# EAGLE board ATA_Test (EAGLE 9.6.2)
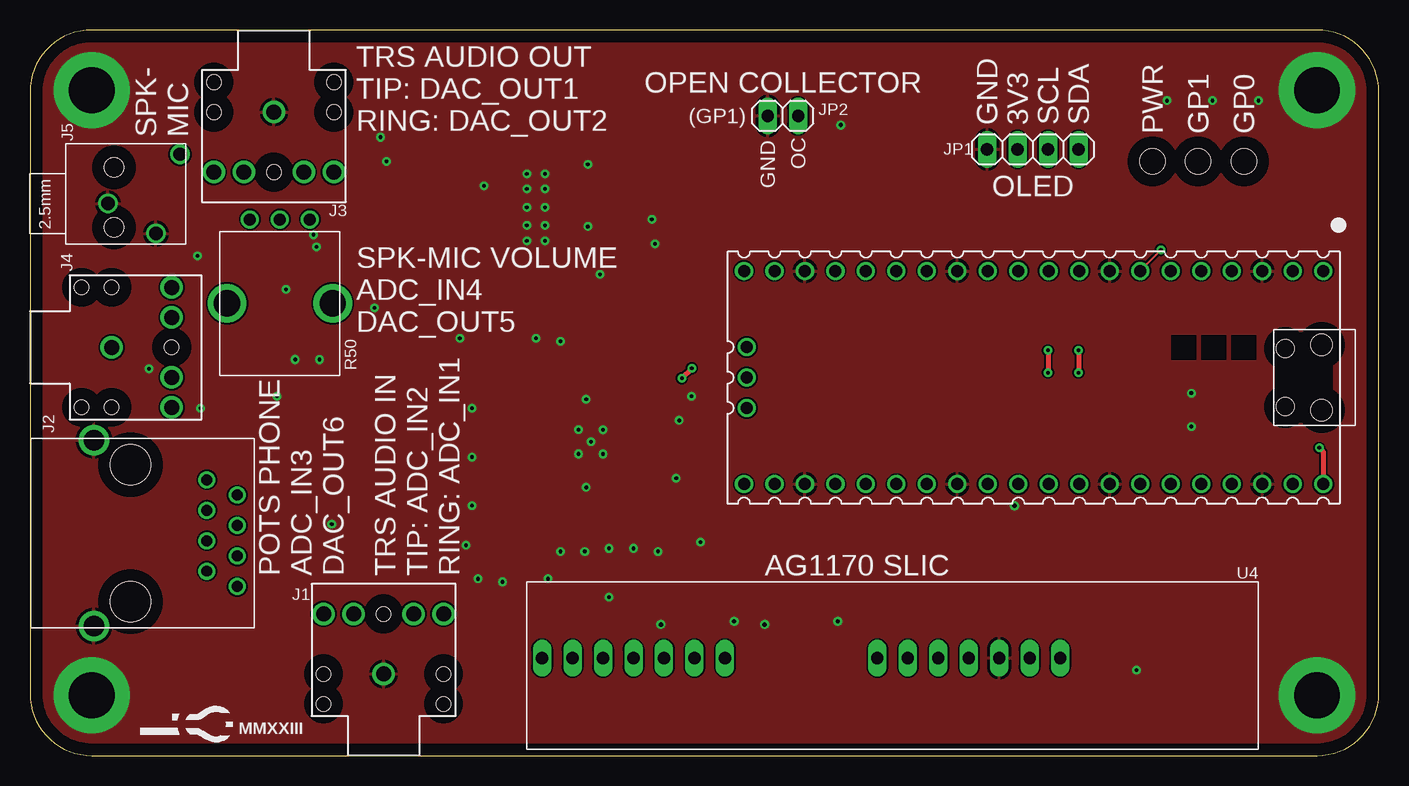
[diagram p0: board, top side]
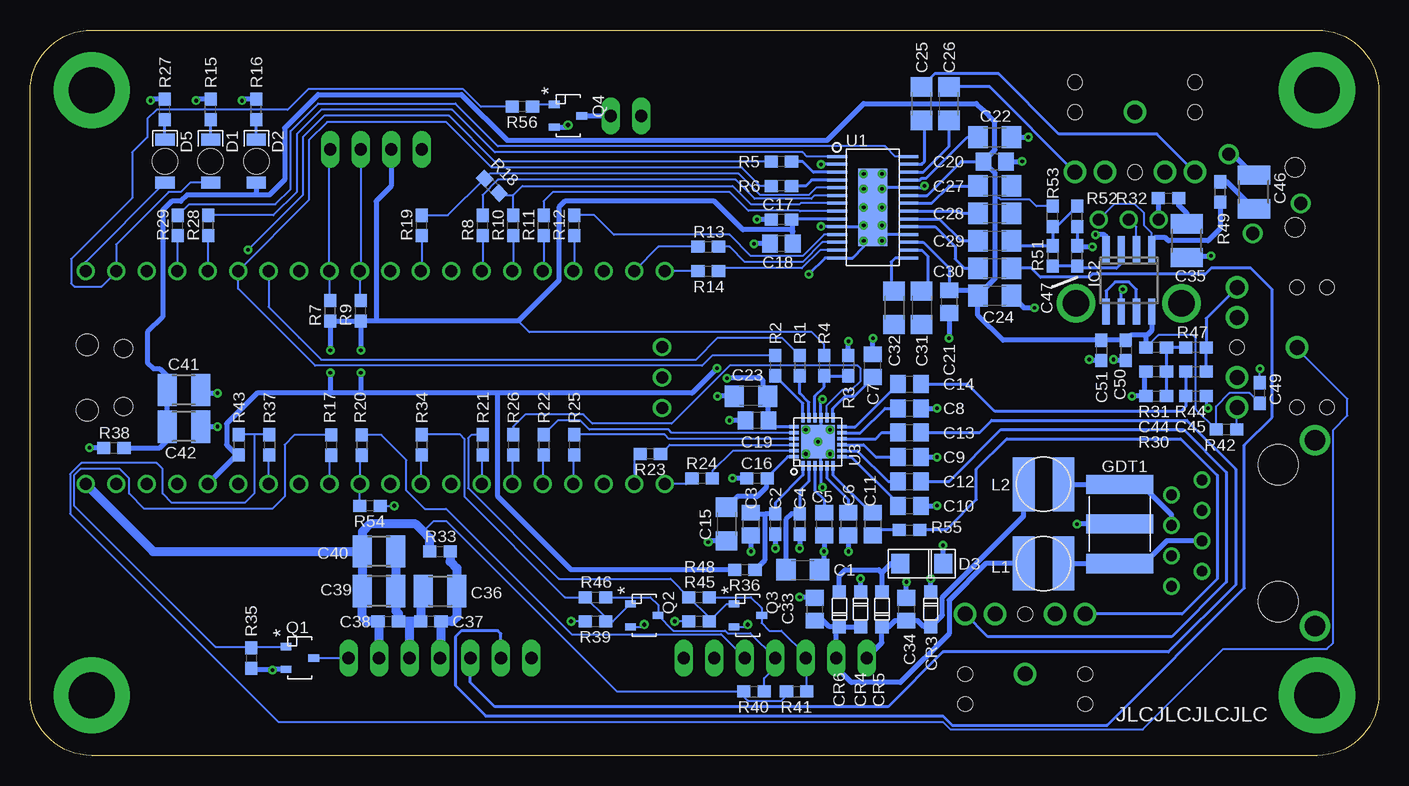
[diagram p1: board, bottom side, seen from below]

Size 112.4 x 60.5 mm. Coordinates in mm from the lower left corner, seen from the top.
Outline: 0,55.35 0,5.15 arc90 5.15,0 107.25,0 arc90 112.4,5.15 112.4,55.35 arc90 107.25,60.5 5.15,60.5 arc90 0,55.35
Copper layers (1*16): Top 0.035mm / dielectric 1.5mm / Bottom 0.035mm
Design rules "default *": minimum track width 6mil, minimum drill 12mil, track to track 6mil, track to pad 6mil, pad to pad 6mil, via to via 6mil, smd to smd 6mil, copper to edge 40mil, drill to drill 6mil, minimum pad ring 10mil, minimum via ring 8mil, stop-mask expansion 4mil, vias tented up to drill 0mil, thermal gap 10mil

## Footprints (pad centres in the part's own frame; a part is rotated, then mirrored left to right if it is on the bottom)
1206 = smd 1.6 x 1.8: 1 -1.4,0; 2 1.4,0
0603 = smd 1.1 x 1: 1 -0.85,0; 2 0.85,0
0805 = smd 1.3 x 1.5: 1 -0.95,0; 2 0.95,0
1210 = smd 1.6 x 2.7: 1 -1.4,0; 2 1.4,0
SOD123 = smd 1.1 x 1.1: 1 -1.45,0; 2 1.45,0
1206_REV = smd 1 x 1.6: A -1.8,0; K 1.8,0 | hole 2.1: 0,0
DO-214AC = smd 1.5 x 1.6: A -1.8,0; C 1.8,0
2036_GDT = smd 1.6 x 5.6: C 0,0; L1 -3.3,0; L2 3.3,0
SO08 = smd 0.6 x 2.2: 1 -1.905,-2.6; 2 -0.635,-2.6; 3 0.635,-2.6; 4 1.905,-2.6; 5 1.905,2.6; 6 0.635,2.6; 7 -0.635,2.6; 8 -1.905,2.6
SJ1-3523N = drill 1.25: 1 0,-3.5; 2 -5,-8.5; 3 5,-8.5; 10 -2.5,-8.5; 11 2.5,-8.5 | hole 1.2: 0,-8.5; 5,-1; -5,-1; 5,-3.5; -5,-3.5
A-2004-2-4-LPS-N-R = drill 0.9: 1 4.445,-6.35; 2 3.175,-8.89; 3 1.905,-6.35; 4 0.635,-8.89; 5 -0.635,-6.35; 6 -1.905,-8.89; 7 -3.175,-6.35; 8 -4.445,-8.89 | drill 1.7: S1 -7.75,3.05; S2 7.75,3.05 | hole 3.35: -5.715,0; 5.715,0
2.5MM_TRS = drill 1.1: R 2.5,7.5; S 0,3.5; T -4.1,9.5 | hole 1.6: -3,4; 2,4
1X04 = drill 1.016 long: 1 -3.81,0; 2 -1.27,0; 3 1.27,0; 4 3.81,0
1X02 = drill 1.016 long: 1 -1.27,0; 2 1.27,0
SDR0403 = smd 4.5 x 1.8: 1 0,1.65; 2 0,-1.65
SOT23-3_CENTERED = smd 0.6 x 0.9: 1 -0.95,-1.15; 2 0.95,-1.15; 3 0,1.15
PTV09 = drill 1: 1 -2.5,0; 2 0,0; 3 2.5,0 | drill 2.2: NC1 -4.4,7; NC2 4.4,7
TSSOP28-POWER = smd 0.25 x 1.65: 1 -4.225,-2.975; 2 -3.575,-2.975; 3 -2.925,-2.975; 4 -2.275,-2.975; 5 -1.625,-2.975; 6 -0.975,-2.975; 7 -0.325,-2.975; 8 0.325,-2.975; 9 0.975,-2.975; 10 1.625,-2.975; 11 2.275,-2.975; 12 2.925,-2.975; 13 3.575,-2.975; 14 4.225,-2.975; 15 4.225,2.975; 16 3.575,2.975; 17 2.925,2.975; 18 2.275,2.975; 19 1.625,2.975; 20 0.975,2.975; 21 0.325,2.975; 22 -0.325,2.975; 23 -0.975,2.975; 24 -1.625,2.975; 25 -2.275,2.975; 26 -2.925,2.975; 27 -3.575,2.975; 28 -4.225,2.975 | smd 6.46 x 2.4: EP 0,0
PICO-PKG-TH = drill 1: 1 -8.89,24.13; 2 -8.89,21.59; 3 -8.89,19.05; 4 -8.89,16.51; 5 -8.89,13.97; 6 -8.89,11.43; 7 -8.89,8.89; 8 -8.89,6.35; 9 -8.89,3.81; 10 -8.89,1.27; 11 -8.89,-1.27; 12 -8.89,-3.81; 13 -8.89,-6.35; 14 -8.89,-8.89; 15 -8.89,-11.43; 16 -8.89,-13.97; 17 -8.89,-16.51; 18 -8.89,-19.05; 19 -8.89,-21.59; 20 -8.89,-24.13; 21 8.89,-24.13; 22 8.89,-21.59; 23 8.89,-19.05; 24 8.89,-16.51; 25 8.89,-13.97; 26 8.89,-11.43; 27 8.89,-8.89; 28 8.89,-6.35; 29 8.89,-3.81; 30 8.89,-1.27; 31 8.89,1.27; 32 8.89,3.81; 33 8.89,6.35; 34 8.89,8.89; 35 8.89,11.43; 36 8.89,13.97; 37 8.89,16.51; 38 8.89,19.05; 39 8.89,21.59; 40 8.89,24.13; 41 -2.54,-23.9; 42 0,-23.9; 43 2.54,-23.9 | hole 1.8: -2.725,24; 2.725,24 | hole 1.5: -2.425,20.97; 2.425,20.97
QFN24-55 = smd 0.8 x 0.3: 1 -2,1.25; 2 -2,0.75; 3 -2,0.25; 4 -2,-0.25; 5 -2,-0.75; 6 -2,-1.25; 13 2,-1.25; 14 2,-0.75; 15 2,-0.25; 16 2,0.25; 17 2,0.75; 18 2,1.25 | smd 0.3 x 0.8: 7 -1.25,-2; 8 -0.75,-2; 9 -0.25,-2; 10 0.25,-2; 11 0.75,-2; 12 1.25,-2; 19 1.25,2; 20 0.75,2; 21 0.25,2; 22 -0.25,2; 23 -0.75,2; 24 -1.25,2 | smd 2.8 x 2.8: EP 0,0
AG1170S = drill 1.016 long: 1 -1.27,0; 2 -3.81,0; 3 -6.35,0; 4 -8.89,0; 5 -11.43,0; 6 -13.97,0; 7 -16.51,0; 8 -29.21,0; 9 -31.75,0; 10 -34.29,0; 11 -36.83,0; 12 -39.37,0; 13 -41.91,0; 14 -44.45,0

## Placement (x,y rotation side)
C1  10uF  [1206]  48.01,15.49 0 bottom
C2  0.1uF  [0603]  50.29,19.3 270 bottom
C3  1uF  [0805]  52.32,19.3 270 bottom
C4  0.1uF  [0603]  48.26,19.3 270 bottom
C5  1uF  [0805]  46.23,19.3 270 bottom
C6  1uF  [0805]  44.2,19.3 270 bottom
C7  1uF  [0805]  42.16,32.51 90 bottom
C8  1uF  [0805]  39.12,28.96 0 bottom
C9  1uF  [0805]  39.12,24.89 0 bottom
C10  1uF  [0805]  39.12,20.83 0 bottom
C11  1uF  [0805]  42.16,19.3 270 bottom
C12  1uF  [0805]  39.12,22.86 0 bottom
C13  1uF  [0805]  39.12,26.92 0 bottom
C14  1uF  [0805]  39.12,30.99 0 bottom
C15  10uF  [1206]  54.36,19.3 270 bottom
C16  0.1uF  [0603]  51.82,23.11 180 bottom
C17  0.1uF  [0603]  49.78,44.7 180 bottom
C18  1uF  [0805]  49.78,42.67 180 bottom
C19  1uF  [0805]  51.82,27.94 180 bottom
C20  1uF  [0805]  32,49.53 0 bottom
C21  1uF  [0805]  35.81,37.85 270 bottom
C22  10uF  [1206]  32,51.56 0 bottom
C23  10uF  [1206]  52.32,29.97 180 bottom
C24  10uF  [1206]  32,38.35 0 bottom
C25  10uF  [1206]  38.1,54.36 90 bottom
C26  10uF  [1206]  35.81,54.36 90 bottom
C27  10uF  [1206]  32,47.5 0 bottom
C28  10uF  [1206]  32,45.21 0 bottom
C29  10uF  [1206]  32,42.93 0 bottom
C30  10uF  [1206]  32,40.64 0 bottom
C31  10uF  [1206]  38.1,37.34 270 bottom
C32  10uF  [1206]  40.39,37.34 270 bottom
C33  1nF  [0805]  46.99,12.19 90 bottom
C34  1nF  [0805]  39.37,12.19 270 bottom
C35  100uF  [1210]  16,42.93 90 bottom
C36  100uF  [1210]  78.23,13.72 0 bottom
C37  0.1uF  [0603]  78.99,11.18 180 bottom
C38  0.1uF  [0603]  82.55,11.18 0 bottom
C39  100uF  [1210]  83.31,13.72 180 bottom
C40  100uF  [1210]  83.31,17.02 180 bottom
C41  100uF  [1210]  99.57,30.48 180 bottom
C42  100uF  [1210]  99.57,27.43 180 bottom
C44  0.1uF  [0603]  18.54,32 180 bottom
C45  1nF  [0603]  15.24,29.97 0 bottom
C46  100uF  [1210]  10.41,46.99 90 bottom
C47  1nF  [0603]  25.15,41.66 90 bottom
C49  0.1uF  [0603]  9.91,30.23 90 bottom
C50  0.1uF  [0603]  21.08,33.78 270 bottom
C51  0.1uF  [0603]  23.11,33.78 270 bottom
CR3  BAS21GWX  [SOD123]  37.34,12.19 270 bottom
CR4  BAS21GWX  [SOD123]  43.18,12.19 270 bottom
CR5  BAS21GWX  [SOD123]  41.4,12.19 90 bottom
CR6  BAS21GWX  [SOD123]  44.96,12.19 90 bottom
D1  156120RS75300  [1206_REV]  97.35,49.55 90 bottom
D2  156120RS75300  [1206_REV]  93.54,49.55 90 bottom
D3  33V  [DO-214AC]  38.1,16 0 bottom
D5  156120RS75300  [1206_REV]  101.16,49.55 90 bottom
GDT1  600V  [2036_GDT]  21.59,19.3 90 bottom
IC2  LM833D  [SO08]  20.83,39.62 180 bottom
J1  SJ1-3523N  [SJ1-3523N]  29.46,3.3 180 top
J2  A-2004-2-4-LPS-N-R  [A-2004-2-4-LPS-N-R]  8.38,18.54 90 top
J3  SJ1-3523N  [SJ1-3523N]  20.32,57.15 0 top
J4  SJ1-3523N  [SJ1-3523N]  3.3,34.04 90 top
J5  SJ-2509N  [2.5MM_TRS]  3,46.04 270 top
JP1  [1X04]  83.57,50.55 0 top
JP2  [1X02]  62.74,53.34 180 top
L1  33uH  [SDR0403]  27.94,16 90 bottom
L2  33uH  [SDR0403]  27.94,22.61 90 bottom
Q1  MMBT3904  [SOT23-3_CENTERED]  89.92,8.13 270 bottom
Q2  DNP  [SOT23-3_CENTERED]  61.21,11.68 270 bottom
Q3  DNP  [SOT23-3_CENTERED]  52.58,11.68 270 bottom
Q4  MMBT3904  [SOT23-3_CENTERED]  67.56,53.34 270 bottom
R1  10  [0603]  48.26,32.51 270 bottom
R2  10  [0603]  50.29,32.51 270 bottom
R3  DNP  [0603]  44.2,32.51 270 bottom
R4  10  [0603]  46.23,32.51 270 bottom
R5  10  [0603]  49.78,49.53 180 bottom
R6  10  [0603]  49.78,47.5 180 bottom
R7  10k  [0603]  87.38,37.08 90 bottom
R8  10  [0603]  74.68,44.2 90 bottom
R9  10k  [0603]  84.84,37.08 90 bottom
R10  10  [0603]  72.14,44.2 90 bottom
R11  10  [0603]  69.6,44.2 90 bottom
R12  10  [0603]  67.06,44.2 90 bottom
R13  10  [0603]  55.88,42.42 0 bottom
R14  10  [0603]  55.88,40.39 0 bottom
R15  10k  [0603]  97.35,53.87 90 bottom
R16  10k  [0603]  93.54,53.87 90 bottom
R17  10k  [0603]  87.31,25.88 270 bottom
R18  DNP  [0603]  73.91,47.5 135 bottom
R19  10  [0603]  79.76,44.2 90 bottom
R20  1k  [0603]  84.77,25.88 270 bottom
R21  10  [0603]  74.68,25.91 270 bottom
R22  10  [0603]  69.6,25.91 270 bottom
R23  10  [0603]  60.71,25.15 180 bottom
R24  10  [0603]  56.39,23.11 180 bottom
R25  10  [0603]  67.06,25.91 270 bottom
R26  10  [0603]  72.14,25.91 270 bottom
R27  10k  [0603]  101.16,53.87 90 bottom
R28  10  [0603]  97.54,44.2 90 bottom
R29  10  [0603]  100.08,44.2 90 bottom
R30  DNP  [0603]  18.54,29.97 0 bottom
R31  1k  [0603]  18.54,34.04 180 bottom
R32  100  [0603]  17.53,46.48 0 bottom
R33  10  [0603]  78.23,17.02 0 bottom
R34  10  [0603]  79.76,25.91 270 bottom
R35  10k  [0603]  93.98,8.13 270 bottom
R36  10  [0603]  52.83,15.49 180 bottom
R37  10  [0603]  92.46,25.91 270 bottom
R38  10  [0603]  105.41,25.65 0 bottom
R39  DNP  [0603]  65.28,11.18 180 bottom
R40  DNP  [0603]  52.07,5.33 0 bottom
R41  DNP  [0603]  48.51,5.33 0 bottom
R42  1k  [0603]  12.7,27.18 180 bottom
R43  1k  [0603]  95,25.91 270 bottom
R44  100  [0603]  15.24,32 0 bottom
R45  DNP  [0603]  56.64,11.18 180 bottom
R46  10  [0603]  65.28,13.21 0 bottom
R47  10k  [0603]  15.24,34.04 180 bottom
R48  10  [0603]  56.64,13.21 0 bottom
R49  10  [0603]  13.21,46.99 90 bottom
R50  10k  [PTV09]  20.83,44.7 180 top
R51  100  [0603]  27.18,41.66 270 bottom
R52  10k  [0603]  25.15,44.96 90 bottom
R53  10k  [0603]  27.18,44.96 90 bottom
R54  2k  [0603]  84.07,20.83 180 bottom
R55  10  [0603]  39.12,18.8 0 bottom
R56  10k  [0603]  71.37,54.1 180 bottom
U1  PCM1681PWPR  [TSSOP28-POWER]  42.16,45.72 270 bottom
U2  RASPBERRY_PICOTH  [PICO-PKG-TH]  83.63,31.52 270 top
U3  TLV320ADC3140  [QFN24-55]  46.74,26.16 90 bottom
U4  AG1170  [AG1170S]  41.4,8.13 180 top

## Library data of the parts
C1-C42 C44-C47 C49-C51 D3 Q1-Q4 R1-R49 R51-R56 U4 = ruark2
CR3-CR6 = ruark2; PARTNO: 1727-7323-1-ND
D1 D2 D5 = ruark2; PARTNO: 732-5031-1-ND
GDT1 = ruark2; PARTNO: 2036-60-SM-RPLFCT-ND
IC2 = linear
J1 J3 J4 = ruark2; PARTNO: CP1-3523N-ND
J2 = ruark2; PARTNO: AE10387-ND
J5 = ruark2; PARTNO: CP-S2509N-ND
JP1 JP2 = pinhead
L1 L2 = ruark2; PARTNO: SDR0403-330KLCT-ND
R50 = ruark2; PARTNO: PTV09A-4025F-A103-ND
U1 = ruark2; PARTNO: 296-41371-1-ND
U2 = RpiPico
U3 = ruark2; PARTNO: 296-TLV320ADC3140IRTWTCT-ND

## Nets
+3V3: C17.1 C18.1 C19.1 C23.1 JP1.2 R4.1 R7.1 R9.1 R36.2 R43.2 U1.9 U2.36 U3.19
+5V: C20.1 C21.1 C24.1 C41.2 C42.2 C49.1 C50.1 C51.1 D2.A IC2.8 R31.2 R38.2 R42.2 R53.2 U1.17 U1.23
ADC_AREG: C1.1 C4.1 U3.2
ADC_BCLK: R23.1 U3.22
ADC_FSYNC: R24.1 U3.23
ADC_GPIO1: R22.1 U3.20
ADC_IN1: J1.3 R55.2
ADC_IN2: C12.2 J1.2
ADC_IN3: C13.2 U4.10
ADC_IN4: C14.2 C45.1 R44.1
ADC_MICBIAS: C6.1 U3.5
ADC_SDOUT: R25.1 U3.21
ADC_SHDNZ: R26.1 U3.14
ADC_VREF: C5.1 U3.3
DAC_BCK: R10.2 R18.1 U1.7
DAC_DATA1: R8.2 U1.6
DAC_DATA2: R12.2 U1.11
DAC_DATA3: R13.2 U1.12
DAC_DATA4: R14.2 U1.13
DAC_LRCK: R11.2 U1.8
DAC_OUT1: C25.2 J3.2
DAC_OUT2: C26.2 J3.3
DAC_OUT3: C27.2
DAC_OUT4: C28.2
DAC_OUT5: C29.2 R51.1 R52.2 R53.1
DAC_OUT6: C30.2 U4.9
DAC_OUT7: C31.2
DAC_OUT8: C32.2
DAC_SCK: R18.2 R19.2 U1.5
DAC_ZR1: R28.2 U1.1
DAC_ZR2: R29.2 U1.28
DNVT_1_SWITCH_TX_BLUE: GDT1.L2 J2.4 L2.2
DNVT_1_SWITCH_TX_BLUE-WHITE: GDT1.L1 J2.5 L1.2
F/R: Q3.3 R41.2 R48.2 U4.3
F/R_R: Q3.1 R21.1 R45.1 R48.1
GND: C1.2 C2.2 C3.2 C4.2 C5.2 C6.2 C7.2 C8.2 C9.2 C10.2 C15.2 C16.2 C17.2 C18.2 C19.2 C20.2 C21.2 C22.2 C23.2 C24.2 C33.2 C34.1 C35.1 C36.1 C37.2 C38.2 C39.1 C40.1 C41.1 C42.1 C44.2 C45.2 C47.2 C49.2 C50.2 C51.2 CR3.1 CR4.1 D3.C GDT1.C IC2.4 IC2.6 J1.1 J2.S1 J2.S2 J3.1 J5.R J5.S JP1.1 JP2.2 Q1.2 Q2.2 Q3.2 Q4.2 R3.1 R15.2 R16.2 R27.2 R30.1 R35.2 R39.2 R45.2 R52.1 R54.1 U1.2 U1.10 U1.14 U1.18 U1.24 U1.EP U2.3 U2.8 U2.13 U2.18 U2.23 U2.28 U2.33 U2.38 U3.4 U3.15 U3.EP U4.12
GP4_I2C0_SDA: R2.1 R6.2 U2.6
GP5_I2C0_SCL: R1.1 R5.2 U2.7
GP6_I2C1_SDA: JP1.4 R7.2 U2.9
GP7_I2C1_SCL: JP1.3 R9.2 U2.10
N$1: C7.1 U3.13
N$2: C8.1 U3.11
N$3: C9.1 U3.9
N$4: C10.1 U3.7
N$5: C14.1 U3.12
N$6: C13.1 U3.10
N$7: C12.1 U3.8
N$8: C11.1 U3.6
N$9: R1.2 U3.17
N$10: C22.1 U1.25
N$11: C15.1 C16.1 U3.24
N$12: R3.2 R4.2 U3.16
N$13: C26.1 U1.26
N$14: C25.1 U1.27
N$15: R2.2 U3.18
N$16: R24.2 U2.21
N$17: R23.2 U2.22
N$18: D1.K R15.1
N$19: R5.1 U1.3
N$20: D2.K R16.1
N$21: R25.2 U2.24
N$22: R22.2 U2.25
N$23: R21.2 U2.27
N$24: R26.2 U2.26
N$25: R17.2 U2.32
N$26: R20.2 R54.2 U2.31
N$27: D5.K R27.1
N$28: JP2.1 Q4.3
N$29: D1.A R56.2 U2.2
N$30: D5.A U2.1
N$31: R19.1 U2.12
N$32: C33.1 CR4.2 CR6.1 L1.1 U4.2
N$33: C34.2 CR3.2 CR5.1 L2.1 U4.1
N$34: CR5.2 CR6.2 D3.A
N$35: R28.1 U2.5
N$36: R8.1 U2.14
N$37: R10.1 U2.15
N$38: R11.1 U2.16
N$39: R12.1 U2.17
N$40: R13.1 U2.19
N$41: R14.1 U2.20
N$42: R6.1 U1.4
N$43: C27.1 U1.22
N$44: C28.1 U1.21
N$45: C29.1 U1.20
N$46: C35.2 R32.2
N$47: C31.1 U1.16
N$48: C32.1 U1.15
N$49: C30.1 U1.19
N$50: R32.1 R50.3
N$51: R29.1 U2.4
N$52: Q1.3 U4.14
N$53: C36.2 C37.1 R33.2 U4.11
N$54: R37.2 U2.34
N$55: R34.2 U2.29
N$56: C11.2 R55.1
N$58: Q4.1 R56.1
N$63: J4.2 R42.1
N$65: J4.3 R44.2 R47.1
N$66: C44.1 R30.2 R31.1 R47.2
N$68: C46.2 J5.T
N$69: IC2.5 IC2.7
N$70: IC2.1 R49.1 R50.1
N$71: C46.1 R49.2
N$72: IC2.2 R50.2
N$73: C47.1 IC2.3 R51.2
PD: Q1.1 R17.1 R35.1
PTT: J4.1 R37.1 R43.1
RM: Q2.3 R40.2 R46.2 U4.4
RM_R: Q2.1 R34.1 R39.1 R46.1
SHK: R20.1 U4.5
SWGND: U2.42
V+: C38.1 C39.2 C40.2 R33.1 R38.1 R40.1 R41.1 U2.40 U4.13
VCC: C2.1 C3.1 R36.1 U3.1
VSYS: U2.39

## Tracks (layer width: path | path; a pad name or v marks a point on that pad's centre or on a via)
+3V3  (via drill 0.3)
  Top 0.406: v84.84,33.78 v84.84,31.93 | v87.38,33.78 v87.38,31.93 | v54.32,31.46 v55.15,32.29
  Bottom 0.152: R4.1 46.23,34.29 47.24,35.31 70.79,35.31 71.72,36.23
  Bottom 0.254: U1.9 48.89,44.74 C17.1 | U3.19 50.34,27.41 C19.1
  Bottom 0.406: C18.1 48.83,43.69 | 48.83,43.69 48.83,44.69 48.89,44.74 | C19.1 50.87,29.91 C23.1 51.31,30.36 51.31,31.24 51.56,31.5 54.29,31.5 v54.32,31.46 | 84.84,30.23 87.38,30.23 | R9.1 R7.1 v87.38,33.78 | R9.1 v84.84,33.78 | v84.84,31.93 84.84,30.23 | 48.83,43.69 48.99,43.85 52.99,43.85 55.37,46.23 67.82,46.23 68.33,45.72 68.33,39.62 71.72,36.23 83.57,36.23 | 83.57,36.23 R9.1 | JP1.2 82.3,47.5 83.57,46.23 83.57,36.23 | v87.38,31.93 87.38,30.23 | v55.15,32.29 57.21,30.23 73.41,30.23 | 73.41,30.23 84.84,30.23 | R36.2 67.31,15.49 73.41,21.59 73.41,30.23 | U2.36 95.17,25.06 R43.2 95.16,25.06 96.01,25.91 96.01,27.69 93.47,30.23 87.38,30.23
+5V
  Bottom 0.152: R53.2 28.54,45.81 29.1,46.37 31.5,46.37 31.61,46.48 32,46.48 | R31.2 18.38,35.05 15.49,35.05 15.24,34.8 15.24,28.87 R42.2 13.55,29.12 12.45,30.23 10.76,30.23 C49.1
  Bottom 0.254: U1.23 37.63,46.7 34.8,49.53 C20.1 | U1.17 37.97,42.8 35.81,40.64 C21.1
  Bottom 0.406: C24.1 32,39.75 32,46.48 32,48.58 32.06,48.63 32.06,48.64 C20.1 32.06,50.42 32.06,50.43 32,50.48 32,52.83 33.02,53.85 33.53,54.36 42.93,54.36 45.97,51.31 72.64,51.31 76.45,55.12 88.39,55.12 91.19,52.32 91.19,48.01 92.46,46.74 93.73,46.74 | C21.1 33.85,38.8 C24.1 | IC2.8 18.92,35.43 19.3,35.05 19.56,35.05 | 19.56,35.05 20.66,35.05 C50.1 C51.1 31.33,34.63 33.4,36.71 C24.1 | R31.2 19.39,34.89 19.56,35.05 | R38.2 101.6,25.65 100.97,26.29 C42.2 C41.2 100.97,31.63 101.6,32.26 102.11,32.26 102.62,32.77 102.62,35.31 101.35,36.58 101.35,45.47 100.58,46.23 99.82,46.23 99.31,46.74 93.73,46.74 | D2.A 93.54,46.92 93.73,46.74
ADC_AREG
  Bottom 0.254: U3.2 47.49,22.87 48.26,22.1 C4.1
  Bottom 0.406: C4.1 48.93,20.15 49.41,19.68 C1.1
ADC_BCLK
  Bottom 0.152: R23.1 59.09,25.91 U3.22
ADC_FSYNC
  Bottom 0.152: U3.23 53.84,25.41 55.54,23.71 R24.1
ADC_GPIO1
  Bottom 0.152: U3.20 58.92,26.91 59.18,27.18 65.79,27.18 66.55,27.94 68.41,27.94 R22.1
ADC_IN1
  Bottom 0.254: J1.3 16.39,11.8 13.46,14.73 13.46,23.37 16.51,26.42 30.99,26.42 33.53,23.88 33.53,21.34 35.81,19.05 36,18.86 36.07,18.8 R55.2
ADC_IN2
  Bottom 0.254: C12.2 35.81,22.86 31.5,27.18 16.26,27.18 12.7,23.62 12.7,14.48 17.27,9.91 32.57,9.91 J1.2
ADC_IN3
  Bottom 0.254: C13.2 33.27,26.92 32.26,27.94 16,27.94 11.94,23.88 11.94,14.22 17.53,8.64 36.32,8.64 40.89,4.06 73.66,4.06 75.69,6.1 U4.10
ADC_IN4
  Bottom 0.254: C14.2 34.29,30.99 32,28.7 16.51,28.7 16.09,29.12 C45.1 R44.1
ADC_MICBIAS
  Bottom 0.254: C6.1 44.2,21.34 45.99,23.13 U3.5
ADC_SDOUT
  Bottom 0.152: U3.21 59.18,26.41 59.52,26.76 R25.1
ADC_SHDNZ
  Bottom 0.152: U3.14 45.99,29.2 44.7,30.48 43.94,30.48 43.18,31.24 43.18,32.26 43.43,32.51 54.1,32.51 58.93,27.69 65.53,27.69 66.29,28.45 71.12,28.45 72.14,27.43 R26.1
ADC_VREF
  Bottom 0.254: U3.3 46.99,22.09 46.23,21.34 C5.1
DAC_BCK
  Bottom 0.152: R10.2 72.14,46.74 | 72.14,46.74 71.37,47.5 53.85,47.5 52.32,45.97 48.26,45.97 48.19,46.05 U1.7 | R18.1 73.15,46.74 72.14,46.74
DAC_DATA1
  Bottom 0.152: U1.6 47.03,46.7 47.3,46.43 52.02,46.43 53.59,48.01 73.41,48.01 74.68,46.74 R8.2
DAC_DATA2
  Bottom 0.152: U1.11 46.22,43.45 48.01,41.66 52.32,41.66 54.1,43.43 63.75,43.43 65.37,45.05 R12.2
DAC_DATA3
  Bottom 0.152: U1.12 46.36,42.8 48.01,41.15 52.83,41.15 54.1,42.42 R13.2
DAC_DATA4
  Bottom 0.152: U1.13 46.56,42.15 48.07,40.64 54.78,40.64 R14.2
DAC_LRCK
  Bottom 0.152: U1.8 48.25,45.4 48.29,45.43 52.55,45.43 54.1,46.99 68.83,46.99 69.6,46.23 R11.2
DAC_OUT1
  Bottom 0.254: J3.2 18.49,51.82 26.67,51.82 31.69,56.84 37.02,56.84 C25.2
DAC_OUT2
  Bottom 0.254: J3.3 32.43,55.76 C26.2
DAC_OUT5
  Bottom 0.254: R52.2 26.85,44.11 R53.1 R51.1 30.18,42.51 C29.2
DAC_OUT6
  Bottom 0.254: U4.9 73.15,10.16 73.41,10.41 76.45,10.41 76.96,9.91 76.96,5.84 74.42,3.3 36.32,3.3 35.56,2.54 22.63,2.54 11.2,13.97 11.2,25.88 8.89,28.19 8.89,38.86 10.67,40.64 13.97,40.64 14.48,40.13 23.88,40.13 24.13,39.88 28.19,39.88 28.96,40.64 C30.2
DAC_SCK
  Bottom 0.152: U1.5 46.89,47.34 47.5,46.74 51.56,46.74 53.34,48.51 74.1,48.51 R18.2 77.57,45.05 R19.2
DAC_ZR1
  Bottom 0.152: U1.1 47.66,49.95 48.01,50.29 73.66,50.29 77.22,53.85 88.14,53.85 90.17,51.82 90.17,46.99 92.11,45.05 R28.2
DAC_ZR2
  Bottom 0.152: R29.2 99.15,45.97 91.95,45.97 90.68,47.24 90.68,52.07 88.39,54.36 76.96,54.36 73.41,50.8 41.15,50.8 40.29,49.95 U1.28
DNVT_1_SWITCH_TX_BLUE
  Bottom 0.406: J2.4 17.27,20.07 19.81,22.6 GDT1.L2 L2.2
DNVT_1_SWITCH_TX_BLUE-WHITE
  Bottom 0.406: J2.5 17.65,17.91 19.56,16 GDT1.L1 L1.2
F/R
  Bottom 0.152: R48.2 52.32,13.21 51.43,12.31 Q3.3 51.43,11.04 50.8,10.41 49.78,10.41 47.75,8.38 U4.3 47.66,8.04 R41.2
F/R_R
  Bottom 0.152: R21.1 75.6,26.76 75.89,26.47 75.89,22.3 68.33,14.73 59.02,14.73 R48.1 55.79,11.51 R45.1 54.33,12.63 Q3.1
GND  (via drill 0.3, 0.35, 3.81 pad 6.35)
  Bottom 0.152: C49.2 v9.91,32.26 | Q2.2 61.4,10.73 v61.21,10.92 | R45.2 v58.67,11.18 | Q3.2 52.77,10.73 v52.58,10.92 | R39.2 v67.31,11.18 | R54.1 v82.04,20.83
  Bottom 0.254: 42.16,44.45 U1.EP 42.16,47.24 41.91,47.5 41.76,47.34 U1.24 38,47.34 v37.85,47.5 | 42.16,44.45 42.52,44.09 U1.10 46.47,44.09 v46.48,44.11 | v47.5,40.13 46.13,41.49 U1.14 43.85,41.49 42.93,42.42 v42.93,42.93 | U1.2 46.47,49.3 v46.48,49.28 | 42.16,44.45 42.16,43.43 42.15,43.45 U1.18 39.18,43.43 | v46.35,29.71 46.49,29.58 U3.15 46.49,26.41 U3.EP 46.49,25.91 U3.4 46.49,22.49 v46.35,22.36 | R30.1 19.56,29.97 | C45.2 14.39,29.12 v14.22,28.96 | R52.1 C47.2 | IC2.6 21.46,38.73 v21.34,38.86
  Bottom 0.406: C22.2 v29.21,51.56 | C20.2 v29.72,49.53 | C24.2 29.59,37.34 v28.7,37.34 | C21.2 v35.81,34.8 | C17.2 v51.82,44.7 | C18.2 v52.07,42.67 | C10.2 v36.83,20.83 | C9.2 v36.83,24.89 | C6.2 v44.2,17.02 | C5.2 v46.23,17.02 46.23,15.87 C1.2 | C4.2 v48.26,17.27 | C2.2 v50.29,17.27 | C3.2 v52.32,17.02 | C15.2 55.76,17.9 v55.88,17.78 | C16.2 v53.85,23.11 | C19.2 v54.1,27.94 | C23.2 v55.12,29.97 | C7.2 v42.16,34.8 | R3.1 v44.2,34.54 | C8.2 v36.83,28.96 | R16.2 94.63,54.72 v94.74,54.61 | R15.2 98.44,54.72 v98.55,54.61 | R27.2 102.25,54.72 v102.36,54.61 | Q1.2 92.14,7.18 | 92.14,7.18 v92.2,7.11 | R35.2 93.88,7.18 92.14,7.18 | GDT1.C v25.15,19.3 | CR4.1 v43.18,14.73 | C33.2 47.06,13.21 v48.26,13.21 | C34.1 v39.37,14.48 | CR3.1 v37.34,14.73 | D3.C 36.3,17.5 v36.32,17.53 | C47.2 25.06,42.42 v23.88,42.42 | C50.2 22.01,32.93 v22.1,33.02 | C44.2 19.56,31.84 19.56,29.97 | R30.1 v20.57,29.97 | C51.2 24.04,32.93 v24.13,33.02 | C35.1 15.87,41.66 v13.97,41.66 | IC2.4 22.73,43.31 22.86,43.43 v23.62,43.43 | C42.1 v96.77,27.43 | C41.1 97.91,30.23 v96.77,30.23 | Q4.2 67.75,52.39 v67.56,52.58
  Bottom 0.762: 80.77,11.18 C37.2 79.84,13.5 C36.1 | 80.77,11.18 C38.2 81.7,11.85 81.91,12.06 C39.1 C40.1 | U4.12 80.77,11.18
  other vias: 5.15,55.48 5.15,5.02 107.25,55.48 107.25,5.02 41.4,48.51 42.93,48.51 41.4,42.93 42.93,45.72 41.4,45.72 41.4,47.24 42.93,47.24 42.93,44.2 41.4,44.2 45.72,27.18 47.75,27.18 47.75,25.15 45.72,25.15 46.74,26.16
  pour Top: 0.2,5.4 0.2,55.1 arc-90 5.35,60.25 107.05,60.25 arc-90 112.2,55.1 112.2,5.4 arc-90 107.05,0.25 5.35,0.25 arc-90
GP4_I2C0_SDA
  Bottom 0.152: R6.2 51.56,47.5 53.09,49.02 73.91,49.02 77.72,52.83 87.63,52.83 89.15,51.31 89.15,46.32 U2.6 95.06,38.93 88.65,32.51 56.39,32.51 55.54,33.36 R2.1
GP5_I2C0_SCL  (via drill 0.3)
  Top 0.152: U2.7 92.52,40.45 v94.23,42.16
  Bottom 0.152: v94.23,42.16 89.66,46.74 89.66,51.56 87.88,53.34 77.47,53.34 73.66,49.53 R5.2 | U2.7 92.52,37.4 90.04,34.92 89.97,34.85 88.14,33.02 56.9,33.02 55.07,34.85 49.75,34.85 R1.1
GP6_I2C1_SDA
  Bottom 0.152: R7.2 87.44,38 U2.9 87.44,50.48 JP1.4
GP7_I2C1_SCL
  Bottom 0.152: R9.2 84.9,38 U2.10 84.84,40.48 JP1.3
N$1
  Bottom 0.254: U3.13 45.49,28.94 44.45,29.97 43.69,29.97 42.16,31.5 C7.1
N$2
  Bottom 0.254: U3.11 43.19,26.91 41.15,28.96 C8.1
N$3
  Bottom 0.254: U3.9 42.93,25.91 41.91,24.89 C9.1
N$4
  Bottom 0.254: U3.7 43.96,24.91 40.07,21.02 C10.1
N$5
  Bottom 0.254: U3.12 43.64,27.41 C14.1
N$6
  Bottom 0.254: U3.10 41.91,26.41 41.4,26.92 C13.1
N$7
  Bottom 0.254: U3.8 43.45,25.41 40.89,22.86 C12.1
N$8
  Bottom 0.254: U3.6 45.49,23.39 42.35,20.25 C11.1
N$9
  Bottom 0.254: U3.17 47.49,29.45 48.26,30.23 R1.2
N$10
  Bottom 0.254: U1.25 38.25,47.99 38.11,48.13 37.72,48.13 34.29,51.56 C22.1
N$11
  Bottom 0.254: U3.24 49.26,24.91 50.97,23.2 C16.1
  Bottom 0.406: C16.1 51.05,23.03 51.05,22.35 51.82,21.59 53.47,21.59 C15.1
N$12
  Bottom 0.254: U3.16 46.99,29.98 46.23,30.73 R4.2 R3.2
N$13
  Bottom 0.254: U1.26 37.97,48.65 35.81,50.8 C26.1
N$14
  Bottom 0.254: U1.27 38.08,49.3 37.85,49.53 37.85,52.7 C25.1
N$15
  Bottom 0.254: U3.18 47.99,29.36 R2.2
N$16
  Bottom 0.152: R24.2 57.72,22.63 U2.21
N$17
  Bottom 0.152: R23.2 62.04,24.66 U2.22
N$18
  Bottom 0.254: D1.K R15.1
N$19
  Bottom 0.254: U1.3 47.12,48.65 48.01,49.53 R5.1
N$20
  Bottom 0.254: D2.K R16.1
N$21
  Bottom 0.152: R25.2 67.12,24.99 U2.24
N$22
  Bottom 0.152: R22.2 69.66,24.99 U2.25
N$23
  Bottom 0.152: R21.2 74.74,24.99 U2.27
N$24
  Bottom 0.152: R26.2 72.2,24.99 U2.26
N$25
  Bottom 0.152: R17.2 87.44,24.9 U2.32
N$26
  Bottom 0.152: R20.2 84.9,24.9 U2.31 84.92,22.61 R54.2
N$27
  Bottom 0.254: D5.K R27.1
N$28
  Bottom 0.406: Q4.3 JP2.1
N$29
  Bottom 0.152: D1.A 99.06,47.75 99.82,46.99 100.84,46.99 105.22,42.61 U2.2 105.22,40.32 106.43,39.12 108.71,39.12 108.97,39.37 108.97,41.4 103.89,46.48 103.89,50.29 102.62,51.56 102.62,53.09 101.85,53.85 90.93,53.85 89.23,55.55 76.28,55.55 74.83,54.1 R56.2
N$30
  Bottom 0.152: D5.A 107.76,41.15 U2.1
N$31
  Bottom 0.152: R19.1 79.76,40.48 U2.12
N$32
  Bottom 0.406: L1.1 32.77,16 35.81,12.95 35.81,10.16 39.88,6.1 43.94,6.1 45.21,7.37 U4.2 45.21,10.49 CR6.1 | CR6.1 CR4.2 | CR6.1 45.79,10.74 46.29,11.24 C33.1
N$33
  Bottom 0.406: U4.1 41.4,9.4 CR5.1 41.33,10.67 40.89,10.67 40.32,11.24 C34.2 38.42,11.24 37.92,10.74 CR3.2 36.37,11.71 36.37,13.19 29.59,19.97 L2.1
N$34
  Bottom 0.406: CR6.2 44.96,14.99 44.45,15.49 41.66,15.49 41.4,15.24 | 41.4,15.24 CR5.2 | D3.A 40.64,16 41.4,15.24
N$35
  Bottom 0.152: R28.1 97.6,43.28 U2.5
N$36
  Bottom 0.152: R8.1 74.68,40.48 U2.14
N$37
  Bottom 0.152: R10.1 72.14,40.48 U2.15
N$38
  Bottom 0.152: R11.1 69.6,40.48 U2.16
N$39
  Bottom 0.152: R12.1 67.06,40.48 U2.17
N$40
  Bottom 0.152: U2.19 62.02,40.43 61.98,40.48 60.03,42.42 R13.1
N$41
  Bottom 0.152: R14.1 56.75,40.41 U2.20
N$42
  Bottom 0.254: U1.4 47.26,47.99 47.75,47.5 R6.1
N$43
  Bottom 0.254: U1.22 37.27,46.05 35.81,47.5 C27.1
N$44
  Bottom 0.254: U1.21 34.98,45.4 34.8,45.21 C28.1
N$45
  Bottom 0.254: U1.20 36.62,44.74 34.8,42.93 C29.1
N$46
  Bottom 0.406: C35.2 16,45.21 16.68,45.89 R32.2
N$47
  Bottom 0.254: U1.16 38.08,42.15 37.59,41.66 37.59,39.25 C31.1
N$48
  Bottom 0.254: U1.15 40.29,41.49 40.64,41.15 40.64,38.99 C32.1
N$49
  Bottom 0.254: U1.19 36.98,44.09 35.31,42.42 35.31,41.4 34.54,40.64 C30.1
N$50
  Bottom 0.406: R32.1 18.38,44.75 R50.3
N$51
  Bottom 0.152: R29.1 100.14,43.28 U2.4
N$52
  Bottom 0.152: Q1.3 U4.14
N$53
  Bottom 0.762: R33.2 77.38,16.17 76.83,15.62 C36.2 76.83,11.56 77.22,11.18 C37.1 78.14,8.22 U4.11
N$54
  Bottom 0.152: U2.34 92.52,24.99 R37.2
N$55
  Bottom 0.152: R34.2 79.82,24.99 U2.29
N$56
  Bottom 0.254: R55.1 41.72,18.8 C11.2
N$58
  Bottom 0.152: Q4.1 70.34,54.29 R56.1
N$63
  Bottom 0.152: R42.1 11.85,28.99 J4.2
N$65
  Bottom 0.254: R44.2 R47.1 14.39,36.45 J4.3
N$66
  Bottom 0.254: R30.2 C44.1 R31.1 R47.2
N$68
  Bottom 0.406: C46.2 12.16,50.14 J5.T
N$69
  Bottom 0.254: IC2.7 20.19,38.87 20.82,39.5 21.97,39.5 22.73,38.73 IC2.5
N$70
  Bottom 0.152: IC2.1 18.92,42.42 18.92,42.93 18.92,43.56 19.56,44.2 19.56,45.21 20.32,45.97 22.06,45.97 R50.1
  Bottom 0.406: R49.1 13.21,43.94 14.22,42.93 17.53,42.93 17.78,43.18 18.67,43.18 18.92,42.93
N$71
  Bottom 0.406: C46.1 12.66,47.84 R49.2
N$72
  Bottom 0.152: IC2.2 20.19,44.07 R50.2
N$73
  Bottom 0.254: R51.2 C47.1 24.98,40.64 21.84,40.64 21.46,41.02 IC2.3
PD
  Bottom 0.152: R17.1 90.36,26.73 91.19,25.91 91.19,21.59 92.2,20.57 102.87,20.57 104.14,21.84 104.14,23.11 104.9,23.88 108.2,23.88 108.75,23.34 108.75,20.86 96.96,9.08 93.98,9.08 | 93.98,9.08 Q1.1 | R35.1 93.98,9.08
PTT
  Bottom 0.152: J4.1 6.45,33.68 6.45,33.58 2.61,29.74 2.61,28.34 3.81,27.14 3.81,9.4 4.32,8.89 12.95,8.89 19.66,2.18 35.71,2.18 36.32,2.79 91.69,2.79 109.05,20.15 109.05,23.46 108.13,24.38 101.85,24.38 101.35,23.88 101.35,21.84 100.58,21.08 94.49,21.08 93.73,21.84 93.73,26.76 | R37.1 93.73,26.76 | 93.73,26.76 R43.1
RM
  Bottom 0.152: R46.2 60.71,13.21 60.06,12.57 Q2.3 58.79,10.41 54.48,10.41 54.27,10.21 52.37,10.21 U4.4 50.29,7.37 51.22,6.44 R40.2
RM_R
  Bottom 0.152: R34.1 76.54,26.76 76.2,26.42 76.2,21.59 67.82,13.21 R46.1 64.43,11.51 R39.1 63.82,11.18 Q2.1
SHK
  Bottom 0.152: R20.1 83.12,26.73 81.03,24.64 81.03,22.1 79.5,20.57 77.72,20.57 67.26,10.11 54.81,10.11 U4.5
V+  (via drill 0.3)
  Top 0.406: v107.44,25.65 107.76,25.33 U2.40
  Bottom 0.152: 79.63,18.67 78.74,19.56 77.72,19.56 63.5,5.33 R40.1 52.92,4.91 52.58,4.57 49.78,4.57 49.36,4.99 R41.1
  Bottom 0.406: R38.1 v107.44,25.65
  Bottom 0.762: U2.40 102.15,17.02 C40.2 | C40.2 C39.2 84.71,11.56 84.33,11.18 C38.1 83.31,11.09 U4.13 | R33.1 79.08,18.12 79.63,18.67 80.26,19.3 84.07,19.3 84.71,18.67 C40.2
VCC
  Bottom 0.254: U3.1 47.99,23.39 50.29,21.08 C2.1
  Bottom 0.406: C2.1 51.05,20.15 | 51.05,20.15 52.22,20.15 C3.1 | R36.1 51.15,16.33 51.15,20.06 51.05,20.15

## Text on the board
tPlace: OPEN COLLECTOR | (GP1) | GND | 3V3 | SCL | SDA | SPK- / MIC | TRS AUDIO OUT / TIP: DAC_OUT1 / RING: DAC_OUT2 | OC | PWR | GP1 | GP0 | GND | OLED | SPK-MIC VOLUME / ADC_IN4 / DAC_OUT5 | POTS PHONE / ADC_IN3 / DAC_OUT6 | TRS AUDIO IN / TIP: ADC_IN2 / RING: ADC_IN1 | AG1170 SLIC | MMXXIII
bPlace: JLCJLCJLCJLC
tStop: 030